# EAGLE board mastermind-v1_0 (EAGLE 9.2.2)
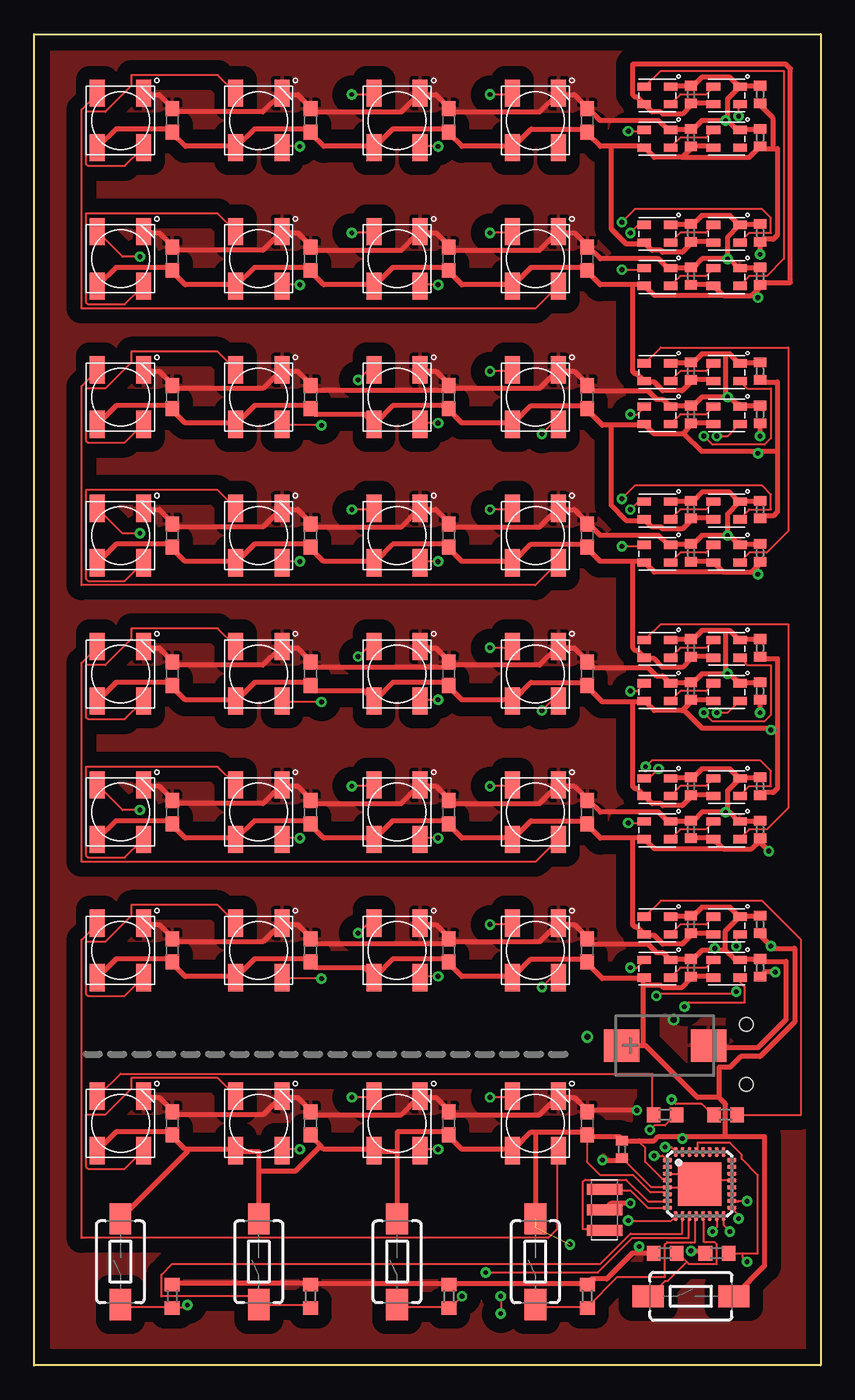
[diagram p0: board, top side]
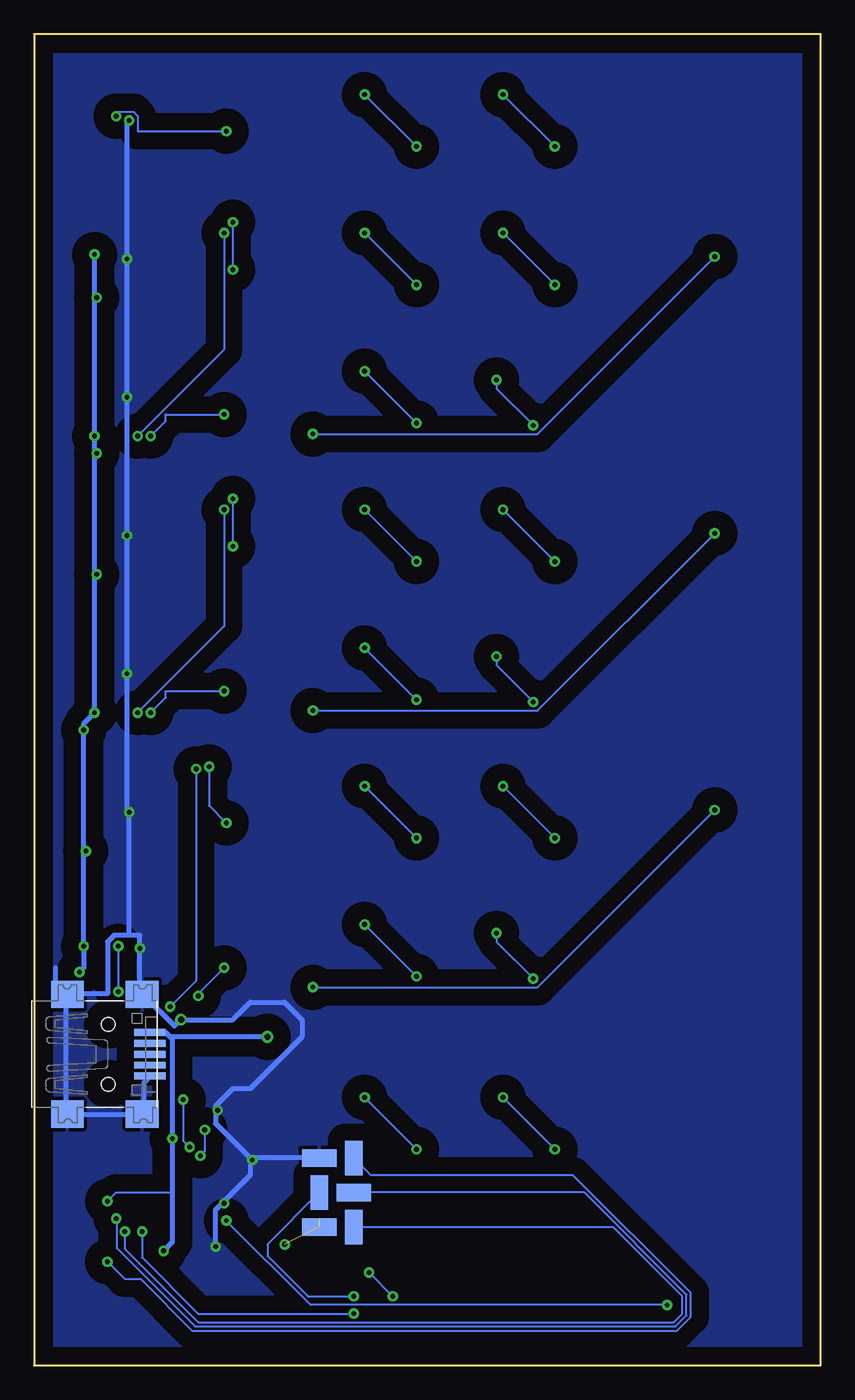
[diagram p1: board, bottom side, seen from below]

Size 57.79 x 97.79 mm. Coordinates in mm from the lower left corner, seen from the top.
Outline: 0,0 0,97.79 57.79,97.79 57.79,0 0,0
Copper layers (1*16): Top 0.035mm / dielectric 1.5mm / Bottom 0.035mm
Design rules "default": minimum track width 6mil, minimum drill 0.35mm, track to track 6mil, track to pad 6mil, pad to pad 6mil, via to via 6mil, smd to smd 6mil, copper to edge 40mil, drill to drill 6mil, minimum pad ring 10mil, minimum via ring 8mil, stop-mask expansion 4mil, vias tented up to drill 0mil, thermal gap 10mil

## Footprints (pad centres in the part's own frame; a part is rotated, then mirrored left to right if it is on the bottom)
RGBLED5050 = smd 2 x 1.1: 1 -2,1.7; 2 -2,-1.7; 3 2,-1.7; 4 2,1.7
C0603 = smd 1.1 x 1: 1 -0.85,0; 2 0.85,0
TACTILE_SWITCH_SMD_6.0X3.5MM = smd 2.3 x 1.6: 1 -3.15,0; 2 3.15,0
MLF32-TH = smd 0.7 x 0.3: 1 -2.35,1.75; 2 -2.35,1.25; 3 -2.35,0.75; 4 -2.35,0.25; 5 -2.35,-0.25; 6 -2.35,-0.75; 7 -2.35,-1.25; 8 -2.35,-1.75; 17 2.35,-1.75; 18 2.35,-1.25; 19 2.35,-0.75; 20 2.35,-0.25; 21 2.35,0.25; 22 2.35,0.75; 23 2.35,1.25; 24 2.35,1.75 | smd 0.3 x 0.7: 9 -1.75,-2.35; 10 -1.25,-2.35; 11 -0.75,-2.35; 12 -0.25,-2.35; 13 0.25,-2.35; 14 0.75,-2.35; 15 1.25,-2.35; 16 1.75,-2.35; 25 1.75,2.35; 26 1.25,2.35; 27 0.75,2.35; 28 0.25,2.35; 29 -0.25,2.35; 30 -0.75,2.35; 31 -1.25,2.35; 32 -1.75,2.35 | smd 3.2 x 3.2: TH 0,0
SK6805-2427 = smd 1 x 0.6: DIN 0.375,1.85; DOUT 2.325,0.55; GND 2.325,1.85; VCC 0.375,0.55
C0402 = smd 0.7 x 0.9: 1 -0.65,0; 2 0.65,0
R0603 = smd 1 x 1.1: 1 -0.85,0; 2 0.85,0
CSTCR6M = smd 0.8 x 2.6: 1 -1.5,0; 2 0,0; 3 1.5,0
USB-MINIB = smd 0.5 x 2.308: D+ 0,4.064; D- -0.8,4.064; GND 1.6,4.064; ID 0.8,4.064; VBUS -1.6,4.064 | smd 2 x 2.4: GND1 -4.4,-2; GND2 -4.4,3.5; GND3 4.4,3.5; GND4 4.4,-2 | hole 1: -2.2,1; 2.2,1
CT7343 = smd 2.6 x 2.4: + -3.2,0; - 3.2,0
SMD1,27-2,54 = smd 1.27 x 2.54: 1 0,0

## Placement (x,y rotation side)
E$1  [RGBLED5050]  6.35,30.48 90 top
E$2  [C0603]  10.16,30.48 90 top
E$3  [RGBLED5050]  16.51,30.48 90 top
E$4  [C0603]  20.32,30.48 90 top
E$5  [RGBLED5050]  26.67,30.48 90 top
E$6  [C0603]  30.48,30.48 90 top
E$7  [RGBLED5050]  36.83,30.48 90 top
E$8  [C0603]  40.64,30.48 90 top
E$9  [RGBLED5050]  6.35,40.64 90 top
E$10  [C0603]  10.16,40.64 90 top
E$11  [RGBLED5050]  16.51,40.64 90 top
E$12  [C0603]  20.32,40.64 90 top
E$13  [RGBLED5050]  26.67,40.64 90 top
E$14  [C0603]  30.48,40.64 90 top
E$15  [RGBLED5050]  36.83,40.64 90 top
E$16  [C0603]  40.64,40.64 90 top
E$17  [RGBLED5050]  6.35,50.8 90 top
E$18  [C0603]  10.16,50.8 90 top
E$19  [RGBLED5050]  16.51,50.8 90 top
E$20  [C0603]  20.32,50.8 90 top
E$21  [RGBLED5050]  26.67,50.8 90 top
E$22  [C0603]  30.48,50.8 90 top
E$23  [RGBLED5050]  36.83,50.8 90 top
E$24  [C0603]  40.64,50.8 90 top
E$25  [RGBLED5050]  6.35,60.96 90 top
E$26  [C0603]  10.16,60.96 90 top
E$27  [RGBLED5050]  16.51,60.96 90 top
E$28  [C0603]  20.32,60.96 90 top
E$29  [RGBLED5050]  26.67,60.96 90 top
E$30  [C0603]  30.48,60.96 90 top
E$31  [RGBLED5050]  36.83,60.96 90 top
E$32  [C0603]  40.64,60.96 90 top
E$33  [TACTILE_SWITCH_SMD_6.0X3.5MM]  6.35,7.62 90 top
E$34  [RGBLED5050]  6.35,17.78 90 top
E$35  [C0603]  10.16,17.78 90 top
E$36  [RGBLED5050]  16.51,17.78 90 top
E$37  [C0603]  20.32,17.78 90 top
E$38  [RGBLED5050]  26.67,17.78 90 top
E$39  [C0603]  30.48,17.78 90 top
E$40  [RGBLED5050]  36.83,17.78 90 top
E$41  [C0603]  40.64,17.78 90 top
E$42  [TACTILE_SWITCH_SMD_6.0X3.5MM]  16.51,7.62 90 top
E$43  [TACTILE_SWITCH_SMD_6.0X3.5MM]  26.67,7.62 90 top
E$44  [TACTILE_SWITCH_SMD_6.0X3.5MM]  36.83,7.62 90 top
E$45  [TACTILE_SWITCH_SMD_6.0X3.5MM]  48.26,5.08 0 top
E$46  [MLF32-TH]  48.9,13.33 0 top
E$47  [RGBLED5050]  6.35,71.12 90 top
E$48  [C0603]  10.16,71.12 90 top
E$49  [RGBLED5050]  16.51,71.12 90 top
E$50  [C0603]  20.32,71.12 90 top
E$51  [RGBLED5050]  26.67,71.12 90 top
E$52  [C0603]  30.48,71.12 90 top
E$53  [RGBLED5050]  36.83,71.12 90 top
E$54  [C0603]  40.64,71.12 90 top
E$55  [RGBLED5050]  6.35,81.28 90 top
E$56  [C0603]  10.16,81.28 90 top
E$57  [RGBLED5050]  16.51,81.28 90 top
E$58  [C0603]  20.32,81.28 90 top
E$59  [RGBLED5050]  26.67,81.28 90 top
E$60  [C0603]  30.48,81.28 90 top
E$61  [RGBLED5050]  36.83,81.28 90 top
E$62  [C0603]  40.64,81.28 90 top
E$63  [RGBLED5050]  6.35,91.44 90 top
E$64  [C0603]  10.16,91.44 90 top
E$65  [RGBLED5050]  16.51,91.44 90 top
E$66  [C0603]  20.32,91.44 90 top
E$67  [RGBLED5050]  26.67,91.44 90 top
E$68  [C0603]  30.48,91.44 90 top
E$69  [RGBLED5050]  36.83,91.44 90 top
E$70  [C0603]  40.64,91.44 90 top
E$71  [SK6805-2427]  44.45,27.94 0 top
E$72  [SK6805-2427]  49.53,27.94 0 top
E$73  [SK6805-2427]  44.45,31.11 0 top
E$74  [SK6805-2427]  49.53,31.11 0 top
E$75  [SK6805-2427]  44.45,38.1 0 top
E$76  [SK6805-2427]  49.53,38.1 0 top
E$77  [SK6805-2427]  44.45,41.27 0 top
E$78  [SK6805-2427]  49.53,41.27 0 top
E$79  [C0402]  48.26,42.54 90 top
E$80  [C0402]  53.34,42.54 90 top
E$81  [C0402]  53.34,39.37 90 top
E$82  [C0402]  48.26,39.37 90 top
E$83  [SK6805-2427]  44.45,48.26 0 top
E$84  [SK6805-2427]  49.53,48.26 0 top
E$85  [SK6805-2427]  44.45,51.43 0 top
E$86  [SK6805-2427]  49.53,51.43 0 top
E$87  [C0402]  48.26,32.38 90 top
E$88  [C0402]  53.34,32.38 90 top
E$89  [C0402]  53.34,29.21 90 top
E$90  [C0402]  48.26,29.21 90 top
E$91  [C0402]  48.26,52.7 90 top
E$92  [C0402]  53.34,52.7 90 top
E$93  [C0402]  53.34,49.53 90 top
E$94  [C0402]  48.26,49.53 90 top
E$95  [SK6805-2427]  44.45,58.42 0 top
E$96  [SK6805-2427]  49.53,58.42 0 top
E$97  [SK6805-2427]  44.45,61.59 0 top
E$98  [SK6805-2427]  49.53,61.59 0 top
E$99  [C0402]  48.26,62.86 90 top
E$100  [C0402]  53.34,62.86 90 top
E$101  [C0402]  53.34,59.69 90 top
E$102  [C0402]  48.26,59.69 90 top
E$103  [SK6805-2427]  44.45,68.58 0 top
E$104  [SK6805-2427]  49.53,68.58 0 top
E$105  [SK6805-2427]  44.45,71.75 0 top
E$106  [SK6805-2427]  49.53,71.75 0 top
E$107  [C0402]  48.26,73.02 90 top
E$108  [C0402]  53.34,73.02 90 top
E$109  [C0402]  53.34,69.85 90 top
E$110  [C0402]  48.26,69.85 90 top
E$111  [SK6805-2427]  44.45,78.74 0 top
E$112  [SK6805-2427]  49.53,78.74 0 top
E$113  [SK6805-2427]  44.45,81.91 0 top
E$114  [SK6805-2427]  49.53,81.91 0 top
E$115  [C0402]  48.26,83.19 90 top
E$116  [C0402]  53.34,83.19 90 top
E$117  [C0402]  53.34,80.01 90 top
E$118  [C0402]  48.26,80.01 90 top
E$119  [SK6805-2427]  44.45,88.9 0 top
E$120  [SK6805-2427]  49.53,88.9 0 top
E$121  [SK6805-2427]  44.45,92.08 0 top
E$122  [SK6805-2427]  49.53,92.08 0 top
E$123  [C0402]  48.26,93.34 90 top
E$124  [C0402]  53.34,93.34 90 top
E$125  [C0402]  53.34,90.17 90 top
E$126  [C0402]  48.26,90.17 90 top
E$127  [R0603]  10.16,5.08 90 top
E$128  [R0603]  20.32,5.08 90 top
E$129  [R0603]  30.48,5.08 90 top
E$130  [R0603]  40.64,5.08 90 top
E$131  [R0603]  46.36,8.25 180 top
E$132  [CSTCR6M]  41.91,11.43 90 top
E$133  [R0603]  50.16,8.25 0 top
E$134  [C0402]  43.18,15.87 90 top
E$135  [R0603]  46.36,18.42 0 top
E$136  [USB-MINIB]  53.34,22.86 270 bottom
E$137  [R0603]  50.8,18.42 0 top
E$138  [CT7343]  46.36,23.5 0 top
E$140  [SMD1,27-2,54]  34.29,10.16 0 bottom
E$141  [SMD1,27-2,54]  36.83,10.16 270 bottom
E$142  [SMD1,27-2,54]  34.29,12.7 270 bottom
E$143  [SMD1,27-2,54]  36.83,12.7 0 bottom
E$144  [SMD1,27-2,54]  34.29,15.24 0 bottom
E$145  [SMD1,27-2,54]  36.83,15.24 270 bottom

## Library data of the parts
E$1 E$3 E$5 E$7 E$9 E$11 E$13 E$15 E$17 E$19 E$21 E$23 E$25 E$27 E$29 E$31 E$34 E$36 E$38 E$40 E$47 E$49 E$51 E$53 E$55 E$57 E$59 E$61 E$63 E$65 E$67 E$69 = ws2812b
E$2 E$4 E$6 E$8 E$10 E$12 E$14 E$16 E$18 E$20 E$22 E$24 E$26 E$28 E$30 E$32 E$35 E$37 E$39 E$41 E$48 E$50 E$52 E$54 E$56 E$58 E$60 E$62 E$64 E$66 E$68 E$70 E$79-E$82 E$87-E$94 E$99-E$102 E$107-E$110 E$115-E$118 E$123-E$131 E$133-E$135 E$137 E$138 = rcl
E$33 E$42-E$45 = SparkFun-Switches
E$46 = atmel
E$71-E$78 E$83-E$86 E$95-E$98 E$103-E$106 E$111-E$114 E$119-E$122 = NeoPixel Nano 2427
E$132 = murata-filter
E$136 = adafruit
E$140-E$145 = wirepad

## Nets
GND [GND]: E$1.3 E$2.2 E$3.3 E$4.2 E$5.3 E$6.2 E$7.3 E$8.2 E$9.3 E$10.2 E$11.3 E$12.2 E$13.3 E$14.2 E$15.3 E$16.2 E$17.3 E$18.2 E$19.3 E$20.2 E$21.3 E$22.2 E$23.3 E$24.2 E$25.3 E$26.2 E$27.3 E$28.2 E$29.3 E$30.2 E$31.3 E$32.2 E$34.3 E$35.2 E$36.3 E$37.2 E$38.3 E$39.2 E$40.3 E$41.2 E$46.3 E$46.5 E$46.21 E$46.TH E$47.3 E$48.2 E$49.3 E$50.2 E$51.3 E$52.2 E$53.3 E$54.2 E$55.3 E$56.2 E$57.3 E$58.2 E$59.3 E$60.2 E$61.3 E$62.2 E$63.3 E$64.2 E$65.3 E$66.2 E$67.3 E$68.2 E$69.3 E$70.2 E$71.GND E$72.GND E$73.GND E$74.GND E$75.GND E$76.GND E$77.GND E$78.GND E$79.2 E$80.2 E$81.2 E$82.2 E$83.GND E$84.GND E$85.GND E$86.GND E$87.2 E$88.2 E$89.2 E$90.2 E$91.2 E$92.2 E$93.2 E$94.2 E$95.GND E$96.GND E$97.GND E$98.GND E$99.2 E$100.2 E$101.2 E$102.2 E$103.GND E$104.GND E$105.GND E$106.GND E$107.2 E$108.2 E$109.2 E$110.2 E$111.GND E$112.GND E$113.GND E$114.GND E$115.2 E$116.2 E$117.2 E$118.2 E$119.GND E$120.GND E$121.GND E$122.GND E$123.2 E$124.2 E$125.2 E$126.2 E$127.2 E$128.2 E$129.2 E$130.2 E$131.2 E$132.2 E$134.1 E$136.GND E$136.GND1 E$136.GND2 E$136.GND3 E$136.GND4 E$138.- E$145.1
S$1: E$1.2 E$3.4
S$2: E$3.2 E$5.4
S$3: E$5.2 E$7.4
S$4: E$7.2 E$9.4
S$5: E$9.2 E$11.4
S$6: E$11.2 E$13.4
S$7: E$13.2 E$15.4
S$8: E$15.2 E$17.4
S$9: E$17.2 E$19.4
S$10: E$19.2 E$21.4
S$11: E$21.2 E$23.4
S$12: E$23.2 E$25.4
S$13: E$25.2 E$27.4
S$14: E$27.2 E$29.4
S$15: E$29.2 E$31.4
S$16: E$34.2 E$36.4
S$17: E$36.2 E$38.4
S$18: E$38.2 E$40.4
S$19: E$1.4 E$40.2
S$20: E$47.2 E$49.4
S$21: E$49.2 E$51.4
S$22: E$51.2 E$53.4
S$23: E$53.2 E$55.4
S$24: E$55.2 E$57.4
S$25: E$57.2 E$59.4
S$26: E$59.2 E$61.4
S$27: E$61.2 E$63.4
S$28: E$63.2 E$65.4
S$29: E$65.2 E$67.4
S$30: E$67.2 E$69.4
S$31: E$69.2
S$32: E$31.2 E$47.4
S$33: E$73.DOUT E$74.DIN
S$34: E$71.DIN E$74.DOUT
S$35: E$71.DOUT E$72.DIN
S$36: E$77.DOUT E$78.DIN
S$37: E$75.DIN E$78.DOUT
S$38: E$75.DOUT E$76.DIN
S$39: E$85.DOUT E$86.DIN
S$40: E$83.DIN E$86.DOUT
S$41: E$83.DOUT E$84.DIN
S$42: E$97.DOUT E$98.DIN
S$43: E$95.DIN E$98.DOUT
S$44: E$95.DOUT E$96.DIN
S$45: E$105.DOUT E$106.DIN
S$46: E$103.DIN E$106.DOUT
S$47: E$103.DOUT E$104.DIN
S$48: E$113.DOUT E$114.DIN
S$49: E$111.DIN E$114.DOUT
S$50: E$111.DOUT E$112.DIN
S$51: E$121.DOUT E$122.DIN
S$52: E$119.DIN E$122.DOUT
S$53: E$119.DOUT E$120.DIN
S$54: E$72.DOUT E$77.DIN
S$55: E$76.DOUT E$85.DIN
S$56: E$84.DOUT E$97.DIN
S$57: E$96.DOUT E$105.DIN
S$58: E$104.DOUT E$113.DIN
S$59: E$112.DOUT E$121.DIN
S$60: E$46.29 E$133.2 E$144.1
S$61: E$33.1 E$46.9 E$127.1
S$62: E$42.1 E$46.10 E$128.1
S$63: E$43.1 E$46.11 E$129.1
S$64: E$44.1 E$46.12 E$130.1
S$65: E$45.1 E$46.13 E$131.1
S$66: E$46.8 E$132.3
S$67: E$46.7 E$132.1
S$68: E$46.1 E$135.2
S$69: E$46.32 E$137.1
S$70: E$34.4 E$135.1
S$71: E$73.DIN E$137.2
S$72: E$46.16 E$140.1
S$73: E$46.15 E$143.1
S$74: E$46.17 E$142.1
VCC [VCC]: E$1.1 E$2.1 E$3.1 E$4.1 E$5.1 E$6.1 E$7.1 E$8.1 E$9.1 E$10.1 E$11.1 E$12.1 E$13.1 E$14.1 E$15.1 E$16.1 E$17.1 E$18.1 E$19.1 E$20.1 E$21.1 E$22.1 E$23.1 E$24.1 E$25.1 E$26.1 E$27.1 E$28.1 E$29.1 E$30.1 E$31.1 E$32.1 E$33.2 E$34.1 E$35.1 E$36.1 E$37.1 E$38.1 E$39.1 E$40.1 E$41.1 E$42.2 E$43.2 E$44.2 E$45.2 E$46.4 E$46.6 E$46.18 E$47.1 E$48.1 E$49.1 E$50.1 E$51.1 E$52.1 E$53.1 E$54.1 E$55.1 E$56.1 E$57.1 E$58.1 E$59.1 E$60.1 E$61.1 E$62.1 E$63.1 E$64.1 E$65.1 E$66.1 E$67.1 E$68.1 E$69.1 E$70.1 E$71.VCC E$72.VCC E$73.VCC E$74.VCC E$75.VCC E$76.VCC E$77.VCC E$78.VCC E$79.1 E$80.1 E$81.1 E$82.1 E$83.VCC E$84.VCC E$85.VCC E$86.VCC E$87.1 E$88.1 E$89.1 E$90.1 E$91.1 E$92.1 E$93.1 E$94.1 E$95.VCC E$96.VCC E$97.VCC E$98.VCC E$99.1 E$100.1 E$101.1 E$102.1 E$103.VCC E$104.VCC E$105.VCC E$106.VCC E$107.1 E$108.1 E$109.1 E$110.1 E$111.VCC E$112.VCC E$113.VCC E$114.VCC E$115.1 E$116.1 E$117.1 E$118.1 E$119.VCC E$120.VCC E$121.VCC E$122.VCC E$123.1 E$124.1 E$125.1 E$126.1 E$133.1 E$134.2 E$136.VBUS E$138.+ E$141.1

## Tracks (layer width: path | path; a pad name or v marks a point on that pad's centre or on a via)
GND  (via drill 0.35, 0.45)
  Top 0.152: E$134.1 45.34,13.08 E$46.5 48.65,13.08 E$46.TH 49.15,13.58 | E$46.21 49.15,13.58 | E$46.3 48.65,14.08 49.15,13.58
  Top 0.381: E$73.GND 46.83,33.02 E$87.2 48.42,33.02 49.05,33.66 51.12,33.66 51.75,33.02 E$74.GND | E$88.2 51.91,33.02 E$74.GND | 50.8,30.48 50.01,30.48 | 50.01,30.48 49.05,30.48 48.42,29.85 E$90.2 48.26,29.85 46.83,29.85 E$71.GND 46.67,29.85 46.2,30.32 45.72,30.32 45.09,30.96 41.12,30.96 40.8,31.27 E$8.2 40.64,31.43 39.69,32.38 38.58,32.38 E$7.3 38.42,32.38 37.15,31.11 30.8,31.11 30.64,31.27 E$6.2 | 50.8,30.48 51.44,29.85 51.75,29.85 E$72.GND 51.91,29.85 53.34,29.85 E$89.2 53.34,29.69 55.24,29.69 55.24,25.4 53.18,23.34 49.85,23.34 49.69,23.5 E$138.- | 50.8,30.48 50.8,31.91 51.75,32.86 E$74.GND | E$1.3 8.1,32.38 9.21,32.38 10.16,31.43 E$2.2 10.32,31.27 10.48,31.11 16.83,31.11 18.1,32.38 E$3.3 18.26,32.38 19.37,32.38 20.32,31.43 E$4.2 20.48,31.27 20.8,30.96 30.8,30.96 E$6.2 | E$6.2 30.48,31.43 29.53,32.38 28.42,32.38 E$5.3 | E$121.GND 46.83,93.98 48.26,93.98 E$123.2 48.42,93.98 49.05,94.61 51.12,94.61 51.75,93.98 E$122.GND | E$124.2 53.34,93.98 51.91,93.98 E$122.GND | E$125.2 53.34,90.8 51.91,90.8 E$120.GND 51.75,90.8 51.59,90.8 50.96,91.44 | 50.96,91.44 v50.8,91.44 49.05,91.44 48.42,90.8 E$126.2 48.26,90.8 46.83,90.8 E$119.GND 46.67,90.8 46.51,90.8 45.88,91.44 41.59,91.44 40.8,92.23 E$70.2 40.64,92.39 39.69,93.34 38.58,93.34 E$69.3 38.42,93.34 37.15,92.08 30.8,92.08 30.64,92.23 E$68.2 30.48,92.39 29.53,93.34 28.42,93.34 E$67.3 28.26,93.34 26.99,92.08 20.64,92.08 20.48,92.23 E$66.2 20.32,92.39 19.37,93.34 18.26,93.34 E$65.3 18.1,93.34 16.83,92.08 10.48,92.08 10.32,92.23 E$64.2 10.16,92.39 9.21,93.34 8.1,93.34 E$63.3 | 50.96,91.44 50.96,93.03 51.75,93.82 E$122.GND
  Top 0.381: E$113.GND 46.83,83.82 48.26,83.82 E$115.2 48.42,83.82 49.05,84.45 51.12,84.45 51.75,83.82 E$114.GND | E$116.2 53.34,83.82 51.91,83.82 E$114.GND | E$117.2 53.34,80.64 51.91,80.64 E$112.GND 51.75,80.64 51.12,81.28 v50.96,81.28 | v50.96,81.28 49.05,81.28 48.42,80.64 E$118.2 48.26,80.64 46.83,80.64 E$111.GND 46.67,80.64 46.51,80.64 45.88,81.28 41.59,81.28 40.8,82.07 E$62.2 40.64,82.23 39.69,83.19 38.58,83.19 E$61.3 38.42,83.19 37.15,81.91 30.8,81.91 30.64,82.07 E$60.2 30.48,82.23 29.53,83.19 28.42,83.19 E$59.3 28.26,83.19 26.99,81.91 20.64,81.91 20.48,82.07 E$58.2 20.32,82.23 19.37,83.19 18.26,83.19 E$57.3 18.1,83.19 16.83,81.91 10.48,81.91 10.32,82.07 E$56.2 10.16,82.23 9.21,83.19 8.1,83.19 E$55.3 | v50.96,81.28 50.96,82.87 51.75,83.66 E$114.GND | E$47.3 8.1,73.02 9.21,73.02 10.16,72.07 E$48.2 10.32,71.91 10.48,71.75 16.83,71.75 18.1,73.02 E$49.3 18.26,73.02 19.37,73.02 20.32,72.07 E$50.2 20.48,71.91 20.8,71.6 30.8,71.6 E$52.2 | E$109.2 53.34,70.48 51.91,70.48 E$104.GND 51.75,70.48 51.12,71.12 v50.96,71.12 50.8,71.12 | 50.8,71.12 49.05,71.12 48.42,70.48 E$110.2 48.26,70.48 46.83,70.48 E$103.GND 46.67,70.48 46.2,70.96 45.72,70.96 45.09,71.6 41.12,71.6 40.8,71.91 E$54.2 40.64,72.07 39.69,73.02 38.58,73.02 E$53.3 38.42,73.02 37.15,71.75 30.8,71.75 30.64,71.91 E$52.2 | E$105.GND 46.83,73.66 E$107.2 48.42,73.66 49.05,74.3 50.8,74.3 | E$108.2 51.91,73.66 E$106.GND 51.75,73.66 51.12,74.3 50.8,74.3 | 50.8,74.3 50.8,71.12 | E$52.2 30.48,72.07 29.53,73.02 28.42,73.02 E$51.3 | E$97.GND 46.83,63.5 48.26,63.5 E$99.2 48.42,63.5 49.05,64.13 51.12,64.13 51.75,63.5 E$98.GND
  Top 0.381: E$100.2 53.34,63.5 51.91,63.5 E$98.GND | E$101.2 53.34,60.33 51.91,60.33 E$96.GND 51.75,60.33 51.12,60.96 v50.96,60.96 | v50.96,60.96 49.05,60.96 48.42,60.33 E$102.2 48.26,60.33 46.83,60.33 E$95.GND 46.67,60.33 46.51,60.33 45.88,60.96 41.59,60.96 40.8,61.75 E$32.2 40.64,61.91 39.69,62.86 38.58,62.86 E$31.3 38.42,62.86 37.15,61.59 30.8,61.59 30.64,61.75 E$30.2 30.48,61.91 29.53,62.86 28.42,62.86 E$29.3 28.26,62.86 26.99,61.59 20.64,61.59 20.48,61.75 E$28.2 20.32,61.91 19.37,62.86 18.26,62.86 E$27.3 18.1,62.86 16.83,61.59 10.48,61.59 10.32,61.75 E$26.2 10.16,61.91 9.21,62.86 8.1,62.86 E$25.3 | v50.96,60.96 50.96,62.55 51.75,63.34 E$98.GND | E$17.3 8.1,52.7 9.21,52.7 10.16,51.75 E$18.2 10.32,51.59 10.48,51.43 16.83,51.43 18.1,52.7 E$19.3 18.26,52.7 19.37,52.7 20.32,51.75 E$20.2 20.48,51.59 20.8,51.28 30.8,51.28 E$22.2 | E$93.2 53.34,50.16 51.91,50.16 E$84.GND 51.75,50.16 51.12,50.8 v50.96,50.8 50.8,50.8 | 50.8,50.8 49.05,50.8 48.42,50.16 E$94.2 48.26,50.16 46.83,50.16 E$83.GND 46.67,50.16 46.2,50.64 45.72,50.64 45.09,51.28 41.12,51.28 40.8,51.59 E$24.2 40.64,51.75 39.69,52.7 38.58,52.7 E$23.3 38.42,52.7 37.15,51.43 30.8,51.43 30.64,51.59 E$22.2 | E$85.GND 46.83,53.34 E$91.2 48.42,53.34 49.05,53.97 50.8,53.97 | E$92.2 51.91,53.34 E$86.GND 51.75,53.34 51.12,53.97 50.8,53.97 | 50.8,53.97 50.8,50.8 | E$22.2 30.48,51.75 29.53,52.7 28.42,52.7 E$21.3 | E$77.GND 46.83,43.18 E$79.2 48.42,43.18 49.05,43.81 51.12,43.81 51.75,43.18 E$78.GND | E$80.2 51.91,43.18 E$78.GND | E$81.2 53.34,40 51.91,40 E$76.GND 51.75,40 51.12,40.64 50.96,40.64
  Top 0.381: 50.96,40.64 v50.8,40.64 49.05,40.64 48.42,40 E$82.2 48.26,40 46.83,40 E$75.GND 46.67,40 46.51,40 45.88,40.64 41.59,40.64 40.8,41.43 E$16.2 40.64,41.59 39.69,42.54 38.58,42.54 E$15.3 38.42,42.54 37.15,41.27 30.8,41.27 30.64,41.43 E$14.2 30.48,41.59 29.53,42.54 28.42,42.54 E$13.3 28.26,42.54 26.99,41.27 20.64,41.27 20.48,41.43 E$12.2 20.32,41.59 19.37,42.54 18.26,42.54 E$11.3 18.1,42.54 16.83,41.27 10.48,41.27 10.32,41.43 E$10.2 10.16,41.59 9.21,42.54 8.1,42.54 E$9.3 | 50.96,40.64 50.96,42.23 51.75,43.02 E$78.GND | E$131.2 44.45,8.25 | 44.45,8.25 43.97,8.25 42.07,6.35 40.96,6.35 40.64,6.03 E$130.2 40.48,6.03 30.64,6.03 E$129.2 30.48,6.03 20.48,6.03 E$128.2 20.32,6.03 10.16,6.03 E$127.2 | E$34.3 8.1,19.69 9.21,19.69 10.16,18.73 E$35.2 10.32,18.57 10.48,18.42 16.83,18.42 18.1,19.69 E$36.3 18.26,19.69 19.37,19.69 20.32,18.73 E$37.2 20.48,18.57 20.64,18.42 26.99,18.42 28.26,19.69 E$38.3 28.42,19.69 29.53,19.69 30.48,18.73 E$39.2 30.64,18.57 30.8,18.42 37.15,18.42 38.42,19.69 E$40.3 38.58,19.69 39.69,19.69 40.64,18.73 E$41.2 40.8,18.73 v44.29,18.73 | v41.75,15.08 43.18,15.08 E$134.1 | E$132.2 42.39,11.91 v43.81,11.91 | v44.45,8.73 44.45,8.25 | v50.01,30.64 50.01,30.48
  Bottom 0.381: E$136.GND 49.37,21.11 49.69,20.8 49.69,18.57 E$136.GND3 50.01,18.42 55.24,18.42 E$136.GND4 55.4,18.57 55.4,27.15 E$136.GND1 | 41.91,15.24 44.45,17.78 44.45,18.73 | 41.91,15.24 v41.75,15.08 41.91,14.92 41.91,13.97 43.89,11.99 | 43.89,11.99 v43.81,11.91 | 50.8,31.59 50.01,31.59 v50.01,30.64 50.01,27.3 E$136.GND2 49.69,27.15 47.47,24.92 v46.99,25.4 43.18,25.4 41.91,26.67 39.37,26.67 38.1,25.4 38.1,24.13 41.91,20.32 43.18,20.32 44.45,19.05 44.45,18.73 | 50.8,31.59 51.91,31.59 52.39,31.11 52.39,27.3 55.24,27.3 E$136.GND1 | v44.29,18.73 44.45,18.73 | 50.8,31.59 v50.8,40.64 50.96,40.64 v50.96,50.8 v50.96,60.96 v50.96,71.12 v50.96,81.28 50.96,91.28 v50.8,91.44 | v44.45,8.73 44.45,11.43 43.89,11.99 | E$136.GND1 56.2,28.12 56.2,29.21 | E$145.1 41.91,15.24
  pour Top (isolate 1.016): 1.27,96.52 57.15,96.52 57.15,1.27 1.27,1.27
  pour Bottom (isolate 1.27): 57.15,1.27 1.27,1.27 1.27,96.52 57.15,96.52
S$1
  Top 0.152: E$1.2 7.94,28.42 6.67,27.15 3.97,27.15 3.81,27.3 3.81,31.11 5.24,31.11 7.14,33.02 7.14,33.81 13.49,33.81 14.76,32.54 E$3.4
S$2  (via drill 0.35)
  Top 0.152: v21.11,28.42 18.26,28.42 E$3.2 | v23.81,31.75 24.45,32.38 24.92,32.38 E$5.4
  Bottom 0.152: v21.11,28.42 23.81,31.11 v23.81,31.75
S$3  (via drill 0.35)
  Top 0.152: v29.69,28.57 28.42,28.57 E$5.2 | v33.5,32.38 35.08,32.38 E$7.4
  Bottom 0.152: v33.5,32.38 v29.69,28.57
S$4  (via drill 0.35)
  Top 0.152: v7.78,40.8 6.51,40.8 4.76,42.54 E$9.4 | v37.31,27.78 37.94,28.42 38.42,28.42 E$7.2
  Bottom 0.152: v7.78,40.8 20.8,27.78 v37.31,27.78
S$5
  Top 0.152: E$9.2 7.94,38.58 6.67,37.31 3.97,37.31 3.81,37.46 3.81,43.97 13.49,43.97 14.76,42.7 E$11.4
S$6  (via drill 0.35)
  Top 0.152: v19.53,38.73 18.26,38.73 E$11.2 | v23.34,42.54 24.92,42.54 E$13.4
  Bottom 0.152: v23.34,42.54 v19.53,38.73
S$7  (via drill 0.35)
  Top 0.152: v29.69,38.73 28.42,38.73 E$13.2 | v33.5,42.54 35.08,42.54 E$15.4
  Bottom 0.152: v33.5,42.54 v29.69,38.73
S$8
  Top 0.152: E$17.4 4.6,52.7 3.49,51.59 3.49,36.99 36.83,36.99 38.42,38.58 E$15.2
S$9
  Top 0.152: E$17.2 7.94,48.74 6.67,47.47 3.97,47.47 3.81,47.62 3.81,51.43 5.24,51.43 7.14,53.34 7.14,54.13 13.49,54.13 14.76,52.86 E$19.4
S$10  (via drill 0.35)
  Top 0.152: v21.11,48.74 18.26,48.74 E$19.2 | v23.81,52.07 24.45,52.7 24.92,52.7 E$21.4
  Bottom 0.152: v21.11,48.74 23.81,51.43 v23.81,52.07
S$11  (via drill 0.35)
  Top 0.152: v29.69,48.89 28.42,48.89 E$21.2 | v33.5,52.7 35.08,52.7 E$23.4
  Bottom 0.152: v33.5,52.7 v29.69,48.89
S$12  (via drill 0.35)
  Top 0.152: v7.78,61.12 6.51,61.12 4.76,62.86 E$25.4 | v37.31,48.1 37.94,48.74 38.42,48.74 E$23.2
  Bottom 0.152: v7.78,61.12 20.8,48.1 v37.31,48.1
S$13
  Top 0.152: E$25.2 7.94,58.9 6.67,57.63 3.97,57.63 3.81,57.78 3.81,64.29 13.49,64.29 14.76,63.02 E$27.4
S$14  (via drill 0.35)
  Top 0.152: v19.53,59.05 18.26,59.05 E$27.2 | v23.34,62.86 24.92,62.86 E$29.4
  Bottom 0.152: v23.34,62.86 v19.53,59.05
S$15  (via drill 0.35)
  Top 0.152: v29.69,59.05 28.42,59.05 E$29.2 | v33.5,62.86 35.08,62.86 E$31.4
  Bottom 0.152: v33.5,62.86 v29.69,59.05
S$16
  Top 0.152: E$34.2 7.94,15.72 6.67,14.45 3.97,14.45 3.81,14.6 3.81,18.42 5.24,18.42 7.14,20.32 7.14,21.11 13.49,21.11 14.76,19.84 E$36.4
S$17  (via drill 0.35)
  Top 0.152: v19.53,15.87 18.26,15.87 E$36.2 | v23.34,19.69 24.92,19.69 E$38.4
  Bottom 0.152: v23.34,19.69 v19.53,15.87
S$18  (via drill 0.35)
  Top 0.152: v29.69,15.87 28.42,15.87 E$38.2 | v33.5,19.69 35.08,19.69 E$40.4
  Bottom 0.152: v33.5,19.69 v29.69,15.87
S$19
  Top 0.152: E$1.4 4.6,32.38 3.49,31.27 3.49,9.37 37.78,9.37 38.42,10 38.42,15.72 E$40.2
S$20
  Top 0.152: E$47.2 7.94,69.06 6.67,67.79 3.97,67.79 3.81,67.94 3.81,71.75 5.24,71.75 7.14,73.66 7.14,74.45 13.49,74.45 14.76,73.18 E$49.4
S$21  (via drill 0.35)
  Top 0.152: v21.11,69.06 18.26,69.06 E$49.2 | v23.81,72.39 24.45,73.02 24.92,73.02 E$51.4
  Bottom 0.152: v21.11,69.06 23.81,71.75 v23.81,72.39
S$22  (via drill 0.35)
  Top 0.152: v29.69,69.22 28.42,69.22 E$51.2 | v33.5,73.02 35.08,73.02 E$53.4
  Bottom 0.152: v33.5,73.02 v29.69,69.22
S$23  (via drill 0.35)
  Top 0.152: v7.78,81.44 6.51,81.44 4.76,83.19 E$55.4 | v37.31,68.42 37.94,69.06 38.42,69.06 E$53.2
  Bottom 0.152: v7.78,81.44 20.8,68.42 v37.31,68.42
S$24
  Top 0.152: E$55.2 7.94,79.22 6.67,77.95 3.97,77.95 3.81,78.11 3.81,84.61 13.49,84.61 14.76,83.34 E$57.4
S$25  (via drill 0.35)
  Top 0.152: v19.53,79.38 18.26,79.38 E$57.2 | v23.34,83.19 24.92,83.19 E$59.4
  Bottom 0.152: v23.34,83.19 v19.53,79.38
S$26  (via drill 0.35)
  Top 0.152: v29.69,79.38 28.42,79.38 E$59.2 | v33.5,83.19 35.08,83.19 E$61.4
  Bottom 0.152: v33.5,83.19 v29.69,79.38
S$27
  Top 0.152: E$63.4 4.6,93.34 3.49,92.23 3.49,77.63 36.83,77.63 38.42,79.22 E$61.2
S$28
  Top 0.152: E$63.2 7.94,89.38 6.67,88.11 3.97,88.11 3.81,88.27 3.81,92.08 5.24,92.08 7.14,93.98 7.14,94.77 13.49,94.77 14.76,93.5 E$65.4
S$29  (via drill 0.35)
  Top 0.152: v19.53,89.53 18.26,89.53 E$65.2 | v23.34,93.34 24.92,93.34 E$67.4
  Bottom 0.152: v23.34,93.34 v19.53,89.53
S$30  (via drill 0.35)
  Top 0.152: v29.69,89.53 28.42,89.53 E$67.2 | v33.5,93.34 35.08,93.34 E$69.4
  Bottom 0.152: v33.5,93.34 v29.69,89.53
S$32
  Top 0.152: E$47.4 4.6,73.02 3.49,71.91 3.49,57.31 36.83,57.31 38.42,58.9 E$31.2
S$33
  Top 0.152: E$73.DOUT 46.83,31.75 47.47,32.38 49.37,32.38 49.85,32.86 E$74.DIN
S$34  (via drill 0.35)
  Top 0.152: v43.81,29.21 44.29,29.21 44.77,29.69 E$71.DIN | v45.72,27.15 45.88,27.3 51.44,27.3 v51.59,27.46 | v51.59,30.8 51.59,31.59 51.75,31.59 E$74.DOUT
  Bottom 0.152: v43.81,29.21 45.72,27.3 v45.72,27.15 | v51.59,30.8 v51.59,27.46
S$35
  Top 0.152: E$71.DOUT 46.83,28.57 47.47,29.21 49.37,29.21 49.85,29.69 E$72.DIN
S$36
  Top 0.152: E$77.DOUT 46.83,41.91 47.47,42.54 49.37,42.54 49.85,43.02 E$78.DIN
S$37  (via drill 0.35)
  Top 0.152: v43.66,39.85 44.77,39.85 E$75.DIN | v44.93,43.97 45.4,44.45 53.34,44.45 54.13,43.66 54.13,42.54 52.55,42.54 51.91,41.91 E$78.DOUT
  Bottom 0.152: v43.66,39.85 44.93,41.12 v44.93,43.97
S$38
  Top 0.152: E$75.DOUT 46.83,38.73 47.47,39.37 49.37,39.37 49.85,39.85 E$76.DIN
S$39
  Top 0.152: E$85.DOUT 46.83,52.07 47.47,52.7 49.37,52.7 49.85,53.18 E$86.DIN
S$40  (via drill 0.35)
  Top 0.152: v43.81,49.53 44.29,49.53 44.77,50.01 E$83.DIN | v49.21,47.94 49.85,47.31 53.66,47.31 54.13,47.78 54.13,51.43 52.39,51.43 51.91,51.91 E$86.DOUT
  Bottom 0.152: v43.81,49.53 48.1,49.53 48.1,49.05 v49.21,47.94
S$41
  Top 0.152: E$83.DOUT 46.83,48.89 47.47,49.53 49.37,49.53 49.85,50.01 E$84.DIN
S$42
  Top 0.152: E$97.DOUT 46.83,62.23 47.47,62.86 49.37,62.86 49.85,63.34 E$98.DIN
S$43  (via drill 0.35)
  Top 0.152: v43.18,60.17 44.77,60.17 E$95.DIN | v43.18,63.66 44.13,64.61 53.5,64.61 54.13,63.98 54.13,62.86 52.55,62.86 51.91,62.23 E$98.DOUT
  Bottom 0.152: v43.18,63.66 v43.18,60.17
S$44
  Top 0.152: E$95.DOUT 46.83,59.05 47.47,59.69 49.37,59.69 49.85,60.17 E$96.DIN
S$45
  Top 0.152: E$105.DOUT 46.83,72.39 47.47,73.02 49.37,73.02 49.85,73.5 E$106.DIN
S$46  (via drill 0.35)
  Top 0.152: v43.81,69.85 44.29,69.85 44.77,70.33 E$103.DIN | v49.21,68.26 49.85,67.63 53.66,67.63 54.13,68.1 54.13,71.75 52.39,71.75 51.91,72.23 E$106.DOUT
  Bottom 0.152: v43.81,69.85 48.1,69.85 48.1,69.37 v49.21,68.26
S$47
  Top 0.152: E$103.DOUT 46.83,69.22 47.47,69.85 49.37,69.85 49.85,70.33 E$104.DIN
S$48
  Top 0.152: E$113.DOUT 46.83,82.55 47.47,83.19 49.37,83.19 49.85,83.66 E$114.DIN
S$49  (via drill 0.35)
  Top 0.152: v43.18,80.49 44.77,80.49 E$111.DIN | v43.18,83.98 44.13,84.93 53.5,84.93 54.13,84.3 54.13,83.19 52.55,83.19 51.91,82.55 E$114.DOUT
  Bottom 0.152: v43.18,83.98 v43.18,80.49
S$50
  Top 0.152: E$111.DOUT 46.83,79.38 47.47,80.01 49.37,80.01 49.85,80.49 E$112.DIN
S$51
  Top 0.152: E$121.DOUT 46.83,92.71 47.47,93.34 49.37,93.34 49.85,93.82 E$122.DIN
S$52  (via drill 0.35)
  Top 0.152: v43.66,90.65 44.77,90.65 E$119.DIN | v51.75,91.76 51.75,92.55 E$122.DOUT
  Bottom 0.152: v43.66,90.65 50.16,90.65 50.16,91.76 50.48,92.08 51.75,92.08 v51.75,91.76
S$53
  Top 0.152: E$119.DOUT 46.83,89.53 47.47,90.17 49.37,90.17 49.85,90.65 E$120.DIN
S$54  (via drill 0.35)
  Top 0.152: v47.78,26.35 48.1,26.67 52.23,26.67 52.23,27.78 51.91,28.1 51.91,28.42 E$72.DOUT | v45.88,43.81 45.24,43.18 44.93,43.18 E$77.DIN
  Bottom 0.152: v47.78,26.35 45.88,28.26 v45.88,43.81
S$55
  Top 0.152: E$76.DOUT 51.91,38.73 52.55,39.37 53.82,39.37 55.4,40.96 55.4,54.45 46.04,54.45 44.93,53.34 E$85.DIN
S$56  (via drill 0.35)
  Top 0.152: v50.16,47.94 50.96,47.94 51.75,48.74 E$84.DOUT | v43.81,62.86 44.29,63.34 44.77,63.34 E$97.DIN
  Bottom 0.152: v50.16,47.94 43.81,54.29 v43.81,62.86
S$57
  Top 0.152: E$96.DOUT 51.91,59.05 52.55,59.69 53.82,59.69 55.4,61.28 55.4,74.77 46.04,74.77 44.93,73.66 E$105.DIN
S$58  (via drill 0.35)
  Top 0.152: v50.16,68.26 50.96,68.26 51.75,69.06 E$104.DOUT | v43.81,83.19 44.29,83.66 44.77,83.66 E$113.DIN
  Bottom 0.152: v50.16,68.26 43.81,74.61 v43.81,83.19
S$59
  Top 0.152: E$112.DOUT 51.91,79.38 52.55,80.01 53.82,80.01 55.09,81.28 55.09,95.09 46.04,95.09 44.93,93.98 E$121.DIN
S$60  (via drill 0.35)
  Top 0.152: E$133.2 52.07,8.25 | 52.07,8.25 53.18,8.25 53.18,13.97 51.99,15.16 51.99,15.48 51.12,16.35 48.74,16.35 48.74,15.72 E$46.29 | v52.39,7.62 52.07,7.94 52.07,8.25
  Bottom 0.152: v52.39,7.62 51.12,6.35 49.96,6.35 46.18,2.56 10.54,2.56 9.55,3.56 9.55,5.33 18.19,13.97 33.02,13.97 E$144.1
S$61  (via drill 0.35)
  Top 0.152: v43.66,10.64 46.83,10.64 47.15,10.95 E$46.9 | v11.27,4.45 11.11,4.29 10.16,4.29 | 10.16,4.29 6.51,4.29 6.35,4.45 E$33.1 | 10.16,4.29 E$127.1
  Bottom 0.152: v43.66,10.64 37.47,4.45 v11.27,4.45
S$62
  Top 0.152: E$46.10 47.62,10.95 47.62,9.68 43.81,9.68 41.59,7.46 10.16,7.46 9.37,6.67 9.37,5.08 16.03,5.08 16.51,4.6 E$42.1 16.51,4.45 20.16,4.45 20.32,4.29 E$128.1
S$63  (via drill 0.35)
  Top 0.152: v33.18,6.83 41.43,6.83 43.97,9.37 48.1,9.37 48.1,10.95 E$46.11 | v31.43,5.08 30.64,4.29 30.48,4.29 | 30.48,4.29 26.83,4.29 26.67,4.45 E$43.1 | 30.48,4.29 E$129.1
  Bottom 0.152: v31.43,5.08 v33.18,6.83
S$64
  Top 0.152: 40.64,4.29 42.86,6.51 46.36,6.51 46.36,8.89 46.51,9.05 48.58,9.05 48.58,10.95 E$46.12 | 40.64,4.29 36.99,4.29 36.83,4.45 E$44.1 | 40.64,4.29 E$130.1
S$65
  Top 0.152: 47.94,7.62 47.31,8.25 E$131.1 | 47.94,7.62 48.1,7.46 50.16,7.46 50.16,8.89 50.01,9.05 49.21,9.05 49.21,10.95 E$46.13 | 47.94,7.62 46.51,6.19 46.36,6.19 45.24,5.08 E$45.1
S$66
  Top 0.152: E$46.8 46.51,11.59 45.09,11.59 43.81,12.86 41.91,12.86 E$132.3
S$67
  Top 0.152: E$46.7 46.51,12.06 45.09,12.06 43.5,13.65 40.48,13.65 40.32,13.49 40.32,10 41.91,10 E$132.1
S$68  (via drill 0.35)
  Top 0.152: v45.56,15.4 46.2,15.4 46.51,15.08 E$46.1 | v45.24,17.3 45.56,17.62 46.36,17.62 47.15,18.42 E$135.2
  Bottom 0.152: v45.56,15.4 45.24,15.72 v45.24,17.3
S$69  (via drill 0.35)
  Top 0.152: v46.36,16.03 46.83,16.03 47.15,15.72 E$46.32 | v46.83,19.53 47.15,19.21 49.05,19.21 49.85,18.42 E$137.1
  Bottom 0.152: v46.36,16.03 46.83,16.51 v46.83,19.53
S$70
  Top 0.152: E$135.1 45.4,18.42 45.4,21.43 6.35,21.43 4.76,19.84 E$34.4
S$71
  Top 0.152: E$137.2 56.36,18.42 56.36,31.27 53.5,34.13 46.04,34.13 44.93,33.02 E$73.DIN
S$72  (via drill 0.35)
  Top 0.152: E$46.16 50.65,10.31 v51.12,9.84
  Bottom 0.152: v51.12,9.84 51.12,8.57 45.72,3.18 10.8,3.18 10.16,3.81 10.16,5.08 15.24,10.16 E$140.1
S$73  (via drill 0.35)
  Top 0.152: E$46.15 50.15,10.14 v49.85,9.84 | v34.29,5.08 v34.29,3.81
  Bottom 0.152: v49.85,9.84 49.85,7.94 45.72,3.81 v34.29,3.81 | E$143.1 40.64,8.89 40.64,8.05 37.67,5.08 v34.29,5.08
S$74  (via drill 0.35)
  Top 0.152: E$46.17 51.75,11.08 v51.75,10.79
  Bottom 0.152: v51.75,10.79 51.72,10.77 51.72,8.64 45.96,2.87 10.67,2.87 9.86,3.68 9.86,5.21 17.35,12.7 E$142.1
VCC  (via drill 0.35, 0.45)  (2 unrouted)
  Top 0.152: E$46.4 46.42,13.71 46.14,13.71 44.9,14.95 44.9,15.97 44.45,16.42 44.45,16.51 | E$46.18 51.27,12.06 51.75,12.06 51.75,12.05 51.74,12.06 v52.39,12.06 | E$46.6 46.42,12.71 45.28,12.71 44.02,13.97 41.59,13.97 40.64,14.92 40.64,16.83
  Top 0.381: E$72.VCC 49.85,28.57 48.26,28.57 E$90.1 48.26,28.42 47.62,27.78 46.2,27.78 46.04,27.94 44.77,27.94 | 44.77,23.5 44.77,27.94 | 44.77,27.94 44.77,28.42 E$71.VCC 44.61,28.42 41.75,28.42 40.64,29.53 E$8.1 40.48,29.69 40.32,29.85 36.51,29.85 35.24,28.57 E$7.1 35.08,28.57 31.43,28.57 30.48,29.53 E$6.1 30.32,29.69 30.16,29.85 26.35,29.85 25.08,28.57 E$5.1 24.92,28.57 24.29,29.21 20.64,29.21 20.32,29.53 E$4.1 20.16,29.69 20,29.85 16.19,29.85 14.92,28.57 E$3.1 14.76,28.57 11.11,28.57 10.16,29.53 E$2.1 10,29.69 9.84,29.85 6.03,29.85 4.76,28.57 E$1.1 | E$138.+ 44.77,23.5 | 21.03,16.11 21.27,15.87 24.92,15.87 E$38.1 25.08,15.72 26.67,15.72 | 21.03,16.11 20.32,16.83 E$37.1 | 26.67,15.72 E$43.2 | 11.27,15.87 14.76,15.87 E$36.1 14.92,15.72 16.51,15.72 16.51,14.29 | 11.27,15.87 11.11,15.87 10.16,16.83 E$35.1 10,16.99 9.84,17.14 6.03,17.14 4.76,15.87 E$34.1 | E$33.2 6.35,10.79 11.27,15.72 11.27,15.87 | 16.51,14.29 E$42.2 | 21.03,16.11 19.21,14.29 16.51,14.29 | v48.26,8.41 49.05,8.41 49.21,8.25 E$133.1 | 36.83,17.14 36.51,17.14 35.24,15.87 E$40.1 35.08,15.87 31.43,15.87 30.48,16.83 E$39.1 30.32,16.99 30.16,17.14 26.67,17.14 26.67,15.72 | 36.83,17.14 40.32,17.14 40.48,16.99 E$41.1 40.64,16.83 43.02,16.83 43.18,16.67 E$134.2 43.34,16.51 44.45,16.51 45.56,16.51 45.88,16.83 47.62,16.83 | 47.62,16.83 50.8,16.83 | 50.8,16.83 53.66,16.83 53.66,7.3 51.44,5.08 E$45.2 | 36.83,17.14 E$44.2 | v47.62,16.67 47.62,16.83 | 50.32,19.69 48.74,19.69 44.93,23.5 44.77,23.5 | 50.32,19.69 50.8,19.21 50.8,16.83 | E$55.1 4.76,79.38 6.03,80.64 9.84,80.64 10,80.49 E$56.1 10.16,80.33 11.11,79.38 14.76,79.38 E$57.1 14.92,79.38 16.19,80.64 20,80.64 20.16,80.49 E$58.1 20.32,80.33 21.27,79.38 24.92,79.38 E$59.1 25.08,79.38 26.35,80.64 30.16,80.64 30.32,80.49 E$60.1 30.48,80.33 31.43,79.38 35.08,79.38 E$61.1 35.24,79.38 36.51,80.64 40.32,80.64 40.48,80.49 E$62.1 40.64,80.33 41.59,79.38 43.97,79.38
  Top 0.381: E$122.VCC 49.85,92.71 48.26,92.71 E$123.1 48.26,92.55 47.62,91.92 46.2,91.92 46.04,92.08 45.4,92.08 44.93,92.55 E$121.VCC 44.77,92.71 44.29,93.19 44.13,93.19 43.97,93.34 43.97,95.57 55.24,95.57 55.56,95.25 55.56,79.53 53.34,79.53 E$117.1 53.34,79.22 52.78,78.66 | E$106.VCC 49.85,72.39 48.26,72.39 E$107.1 48.26,72.23 47.62,71.6 46.2,71.6 45.56,72.23 44.93,72.23 E$105.VCC 44.77,72.39 44.29,72.87 44.13,72.87 43.97,73.02 43.97,79.38 | E$118.1 48.26,79.38 49.85,79.38 E$112.VCC 50.01,79.22 50.64,78.58 | 52.78,78.66 52.7,78.58 50.64,78.58 | 50.64,78.58 45.56,78.58 44.93,79.22 E$111.VCC 44.77,79.38 43.97,79.38 | 54.29,89.38 53.34,89.38 E$125.1 53.18,89.38 52.55,88.74 47.62,88.74 | 54.29,89.38 54.61,89.38 54.61,83.03 54.29,82.71 53.5,82.71 53.34,82.55 E$116.1 v53.34,81.6 | 54.29,89.38 54.29,91.6 53.34,92.55 E$124.1 | E$114.VCC 49.85,82.55 48.26,82.55 E$115.1 48.26,82.39 47.62,81.76 46.2,81.76 46.04,81.91 45.4,81.91 44.93,82.39 E$113.VCC 44.77,82.39 43.5,82.39 42.39,83.5 42.39,89.53 | E$120.VCC 49.85,89.53 48.26,89.53 E$126.1 48.26,89.38 47.62,88.74 | 47.62,88.74 45.56,88.74 44.93,89.38 E$119.VCC 44.77,89.53 42.39,89.53 | 42.39,89.53 41.59,89.53 40.64,90.49 E$70.1 40.48,90.65 40.32,90.8 36.51,90.8 35.24,89.53 E$69.1 35.08,89.53 31.43,89.53 30.48,90.49 E$68.1 30.32,90.65 30.16,90.8 26.35,90.8 25.08,89.53 E$67.1 24.92,89.53 21.27,89.53 20.32,90.49 E$66.1 20.16,90.65 20,90.8 16.19,90.8 14.92,89.53 E$65.1 14.76,89.53 11.11,89.53 10.16,90.49 E$64.1 10,90.65 9.84,90.8 6.03,90.8 4.76,89.53 E$63.1 | 54.61,67.15 54.61,72.23 53.34,72.23 E$108.1
  Top 0.381: 54.61,67.15 54.61,62.71 54.29,62.39 53.5,62.39 53.34,62.23 E$100.1 | E$98.VCC 49.85,62.23 48.26,62.23 E$99.1 48.26,62.07 47.62,61.44 46.2,61.44 46.04,61.59 45.4,61.59 44.93,62.07 E$97.VCC 44.77,62.07 43.5,62.07 42.39,63.18 42.39,69.06 | E$104.VCC 49.85,69.22 48.26,69.22 E$110.1 48.26,69.06 47.62,68.42 | 47.62,68.42 45.56,68.42 44.93,69.06 E$103.VCC 44.77,69.06 42.39,69.06 | 42.39,69.06 41.75,69.06 40.64,70.17 E$54.1 40.48,70.33 40.32,70.48 36.51,70.48 35.24,69.22 E$53.1 35.08,69.22 31.43,69.22 30.48,70.17 E$52.1 30.32,70.33 30.16,70.48 26.35,70.48 25.08,69.22 E$51.1 24.92,69.22 24.29,69.85 20.64,69.85 20.32,70.17 E$50.1 20.16,70.33 20,70.48 16.19,70.48 14.92,69.22 E$49.1 14.76,69.22 11.11,69.22 10.16,70.17 E$48.1 10,70.33 9.84,70.48 6.03,70.48 4.76,69.22 E$47.1 | 53.18,67.15 49.05,67.15 47.78,68.42 47.62,68.42 | 53.18,67.15 54.61,67.15 | E$86.VCC 49.85,52.07 E$91.1 48.26,51.91 47.62,51.28 46.2,51.28 45.56,51.91 44.93,51.91 E$85.VCC 44.77,52.07 44.29,52.55 44.13,52.55 43.97,52.7 43.97,59.05 | E$102.1 48.26,59.05 49.85,59.05 E$96.VCC 50.01,58.9 50.64,58.26 | 52.78,58.34 52.7,58.26 50.64,58.26 | 52.78,58.34 53.34,58.9 E$101.1 | 50.64,58.26 45.56,58.26 44.93,58.9 E$95.VCC 44.77,59.05 43.97,59.05 | 43.97,59.05 41.59,59.05 40.64,60.01 E$32.1 40.48,60.17 40.32,60.33 36.51,60.33 35.24,59.05 E$31.1 35.08,59.05 31.43,59.05 30.48,60.01 E$30.1 30.32,60.17 30.16,60.33 26.35,60.33 25.08,59.05 E$29.1 24.92,59.05 21.27,59.05 20.32,60.01 E$28.1 20.16,60.17 20,60.33 16.19,60.33 14.92,59.05 E$27.1 14.76,59.05 11.11,59.05 10.16,60.01 E$26.1 10,60.17 9.84,60.33 6.03,60.33 4.76,59.05 E$25.1
  Top 0.381: E$74.VCC 49.85,31.75 E$87.1 48.26,31.59 47.62,30.96 46.2,30.96 45.56,31.59 44.93,31.59 E$73.VCC 44.77,31.75 44.29,32.23 44.13,32.23 43.97,32.38 43.97,38.73 | E$82.1 48.26,38.73 49.85,38.73 E$76.VCC 50.01,38.58 50.64,37.94 | 50.64,37.94 52.7,37.94 53.34,38.58 E$81.1 53.34,38.42 v53.98,37.78 | 50.64,37.94 45.56,37.94 44.93,38.58 E$75.VCC 44.77,38.73 43.97,38.73 | 43.97,38.73 41.59,38.73 40.64,39.69 E$16.1 40.48,39.85 40.32,40 36.51,40 35.24,38.73 E$15.1 35.08,38.73 31.43,38.73 30.48,39.69 E$14.1 30.32,39.85 30.16,40 26.35,40 25.08,38.73 E$13.1 24.92,38.73 21.27,38.73 20.32,39.69 E$12.1 20.16,39.85 20,40 16.19,40 14.92,38.73 E$11.1 14.76,38.73 11.11,38.73 10.16,39.69 E$10.1 10,39.85 9.84,40 6.03,40 4.76,38.73 E$9.1 | v54.45,28.89 53.66,28.89 53.34,28.57 E$89.1 | E$88.1 53.34,31.59 v54.13,30.8 54.13,30.64 55.88,30.64 55.88,25.24 53.34,22.7 51.91,22.7 51.12,21.91 50.32,21.91 50.32,19.69 | v53.34,47.94 E$93.1 | v53.34,68.26 E$109.1 | 54.61,46.83 54.61,51.91 53.34,51.91 E$92.1 | 54.61,46.83 54.61,42.39 54.29,42.07 53.5,42.07 53.34,41.91 E$80.1 | E$78.VCC 49.85,41.91 48.26,41.91 E$79.1 48.26,41.75 47.62,41.12 46.2,41.12 46.04,41.27 45.4,41.27 44.93,41.75 E$77.VCC 44.77,41.91 44.29,42.39 44.13,42.39 43.97,42.54 43.97,48.74 | E$84.VCC 49.85,48.89 48.26,48.89 E$94.1 48.26,48.74 47.62,48.1 | 47.62,48.1 45.56,48.1 44.93,48.74 E$83.VCC 44.77,48.74 43.97,48.74 | 43.97,48.74 41.75,48.74 40.64,49.85 E$24.1 40.48,50.01 40.32,50.16 36.51,50.16 35.24,48.89 E$23.1 35.08,48.89 31.43,48.89 30.48,49.85 E$22.1 30.32,50.01 30.16,50.16 26.35,50.16 25.08,48.89 E$21.1 24.92,48.89 24.29,49.53 20.64,49.53 20.32,49.85 E$20.1 20.16,50.01 20,50.16 16.19,50.16 14.92,48.89 E$19.1 14.76,48.89 11.11,48.89 10.16,49.85 E$18.1 10,50.01 9.84,50.16 6.03,50.16 4.76,48.89 E$17.1
  Top 0.381: 54.13,46.83 49.05,46.83 47.78,48.1 47.62,48.1 | 54.13,46.83 54.61,46.83 | v54.13,46.67 54.13,46.83 | 52.78,58.34 53.02,58.1 v53.18,58.1 | v53.18,66.99 53.18,67.15 | 52.78,78.66 53.02,78.42 v53.18,78.42
  Bottom 0.152: v52.39,12.06 51.75,12.7 47.62,12.7
  Bottom 0.381: v48.26,8.41 47.62,9.05 47.62,12.7 v47.62,16.67 47.62,23.97 47.78,24.13 | E$136.VBUS 49.21,24.45 48.1,24.45 47.78,24.13 | v54.45,28.89 54.13,29.21 v54.13,30.8 54.13,37.78 | 54.13,37.78 v54.13,46.67 54.13,47.15 v53.34,47.94 53.34,58.1 | 53.34,58.1 53.34,66.99 | 53.34,66.99 v53.34,68.26 53.34,78.42 | v53.98,37.78 54.13,37.78 | v53.18,58.1 53.34,58.1 | v53.18,66.99 53.34,66.99 | 53.34,78.42 v53.34,81.6 | v53.18,78.42 53.34,78.42 | v40.64,24.13 47.78,24.13
  other vias: 39.37,8.89

## Text on the board
tDocu: 7 | 6 | 5 | 4 | 3 | 2 | 1 | MASTERMIND - PCB | by MAIA / 2019 | v1.0
bDocu: MASTERMIND - PCB | by J. Maia | 2019 | . | PCB version 1.0